# Altium PCB MainBoard.PcbDoc
Units mil, origin at the board's own origin, x right, y up, seen from the top; angles counter-clockwise.
Board outline 1023.62 x 1496.06 mil, 2 copper layers (Top Layer, Bottom Layer), stack 61.855 mil thick; 25 components, 21 nets, 158 pads, 26 vias.
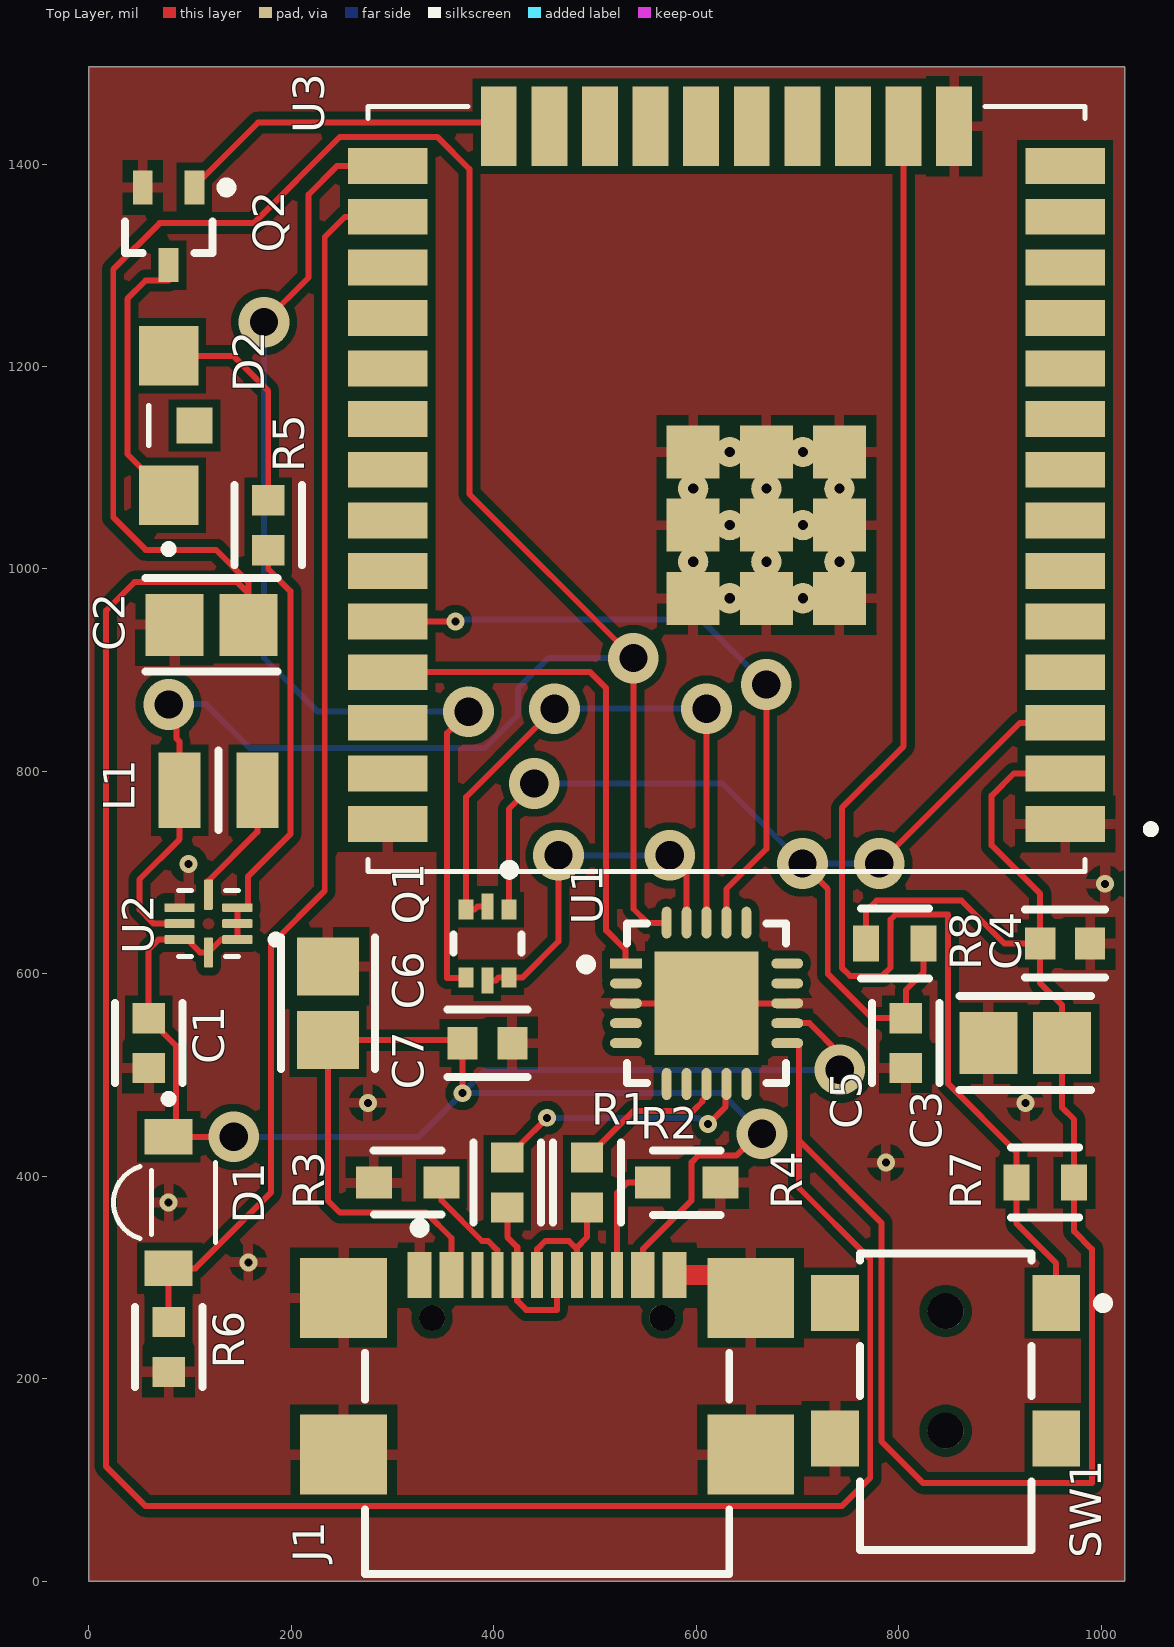
[diagram p0: Top Layer view]
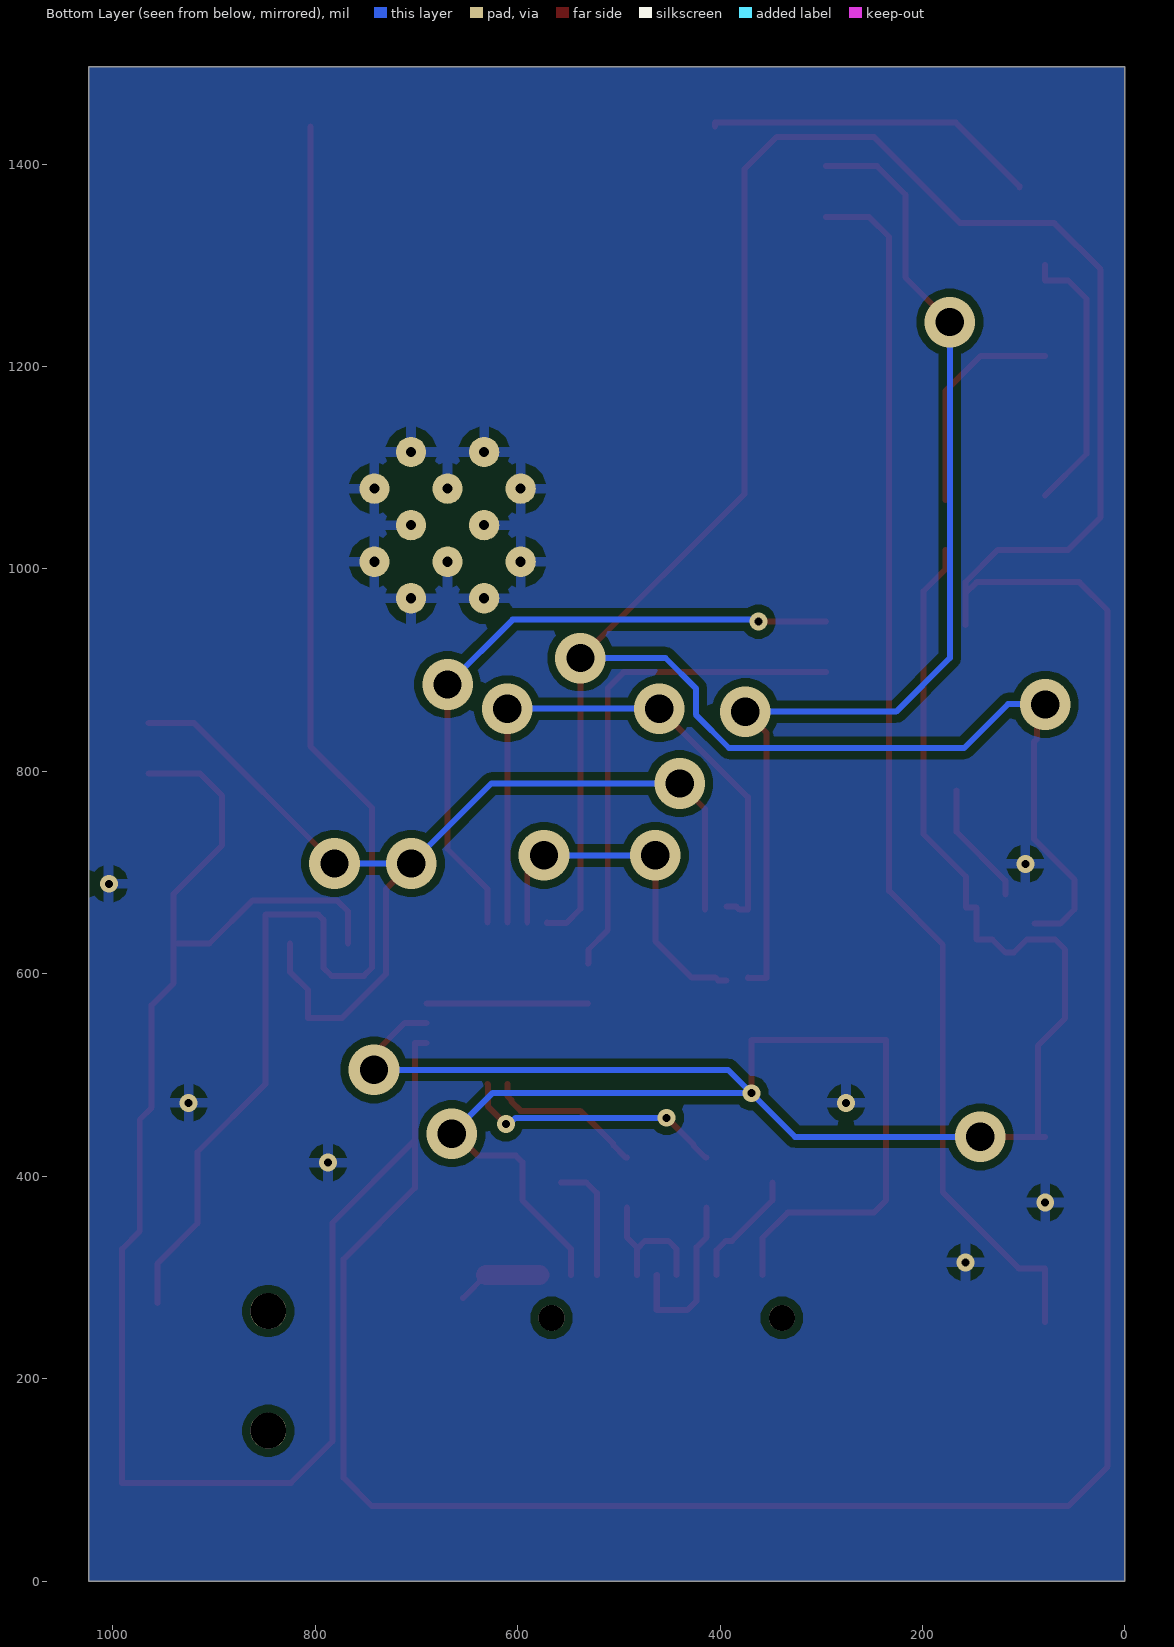
[diagram p1: Bottom Layer view, seen from below]
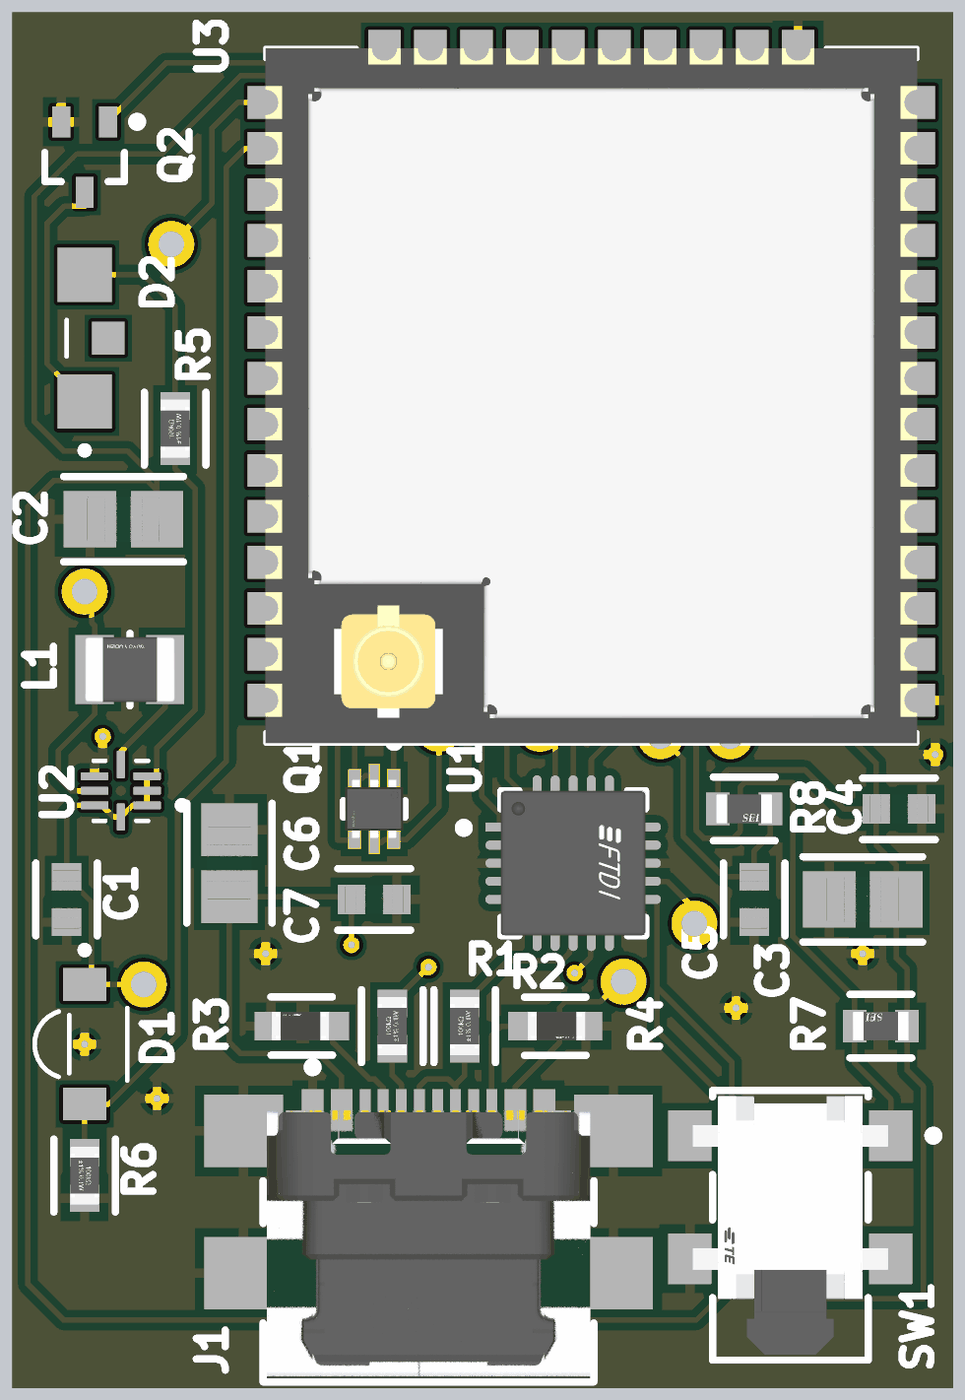
[diagram p2: 3D render of the assembled board from above, using the file's embedded part models]

## Layer stack, top to bottom
Top Solder: solder mask 0.4, Solder Resist, Dk 3.5
Top Layer: signal copper 1.4
Dielectric 1: dielectric 59.0551, FR-4, Dk 4.8
Bottom Layer: signal copper 1.4
Bottom Solder: solder mask 0.4, Solder Resist, Dk 3.5

## Board outline
0,0 1023.62,0 1023.62,1496.06 0,1496.06

## Design rules (kind name [scope] priority, off if disabled: settings)
Clearance [All] p1: gap=7.87 ignorepadtopadclearanceinfootprint=FALSE except(0: Arc-Hole Track-Hole SMDPad-Hole THPad-Hole Via-Hole Fill-Hole Poly-Hole Region-Hole Text-Hole; 5.91: Arc-Arc)
DiffPairsRouting [All] p1: maxlimit=10 minlimit=10 mostfreqgap=10 toplayer_minwidth=5 toplayer_maxwidth=15 toplayer_prefwidth=6 bottomlayer_minwidth=5 bottomlayer_maxwidth=15 bottomlayer_prefwidth=6 maxuncoupledlength=500
PolygonConnect [All] p1: connectstyle=Relief reliefconductorwidth=10 reliefentries=4 polygonreliefangle="90 Angle" airgapwidth=10
RoomDefinition USB [InComponentClass('USB')] p1: confinementstyle=ConfineIn formatcopy=TRUE lockcomponents=FALSE outline -39.37,-39.37 1062.99,-39.37 1062.99,1535.43 -39.37,1535.43
RoomDefinition Microcontroller [InComponentClass('Microcontroller')] p2: confinementstyle=ConfineIn formatcopy=TRUE lockcomponents=FALSE outline -39.37,-39.37 1062.99,-39.37 1062.99,1535.43 -39.37,1535.43
RoomDefinition Power [InComponentClass('Power')] p3: confinementstyle=ConfineIn formatcopy=TRUE lockcomponents=FALSE outline -39.37,-39.37 1062.99,-39.37 1062.99,1535.43 -39.37,1535.43
RoutingVias [All] p1: holewidth=28 width=50 viastyle="Through Hole" minholewidth=28 minwidth=50 maxholewidth=28 maxwidth=50
SolderMaskExpansion [All] p1: expansion=4 istentingtop=FALSE
Width [All] p1: maxlimit=10 minlimit=5.91 preferedwidth=5.91 minimp=50.000000 maximp=50.000000 favimp=50.000000
29 further rules are at their usual default settings.

## Classes and differential pairs
component class USB: C6 C7 J1 Q1 R1 R2 R3 R4 U1
component class Power: C1 C2 L1 U2
component class Microcontroller: C3 C4 C5 D1 D2 Q2 R5 R6 R7 R8 SW1
differential pair D: +D_P -D_N

## Components (designator, comment, footprint, x,y, rotation, side; value= is the part's Value field where it differs from the comment)
C1 "CL10A475KP8NNNC" FP-CL10-IPC_C 59.06,531.5 r270 top
C2 "CL21A106KQFNNNE" FP-CL21-IPC_A 121.03,944.88 r180 top
C3 "CL21A226MQQNNNE" FP-CL21-IPC_A 925.2,531.5 r180 top
C4 "CL10B104MB8NNNC" FP-CL10-IPC_C 964.57,629.92 r0 top
C5 "CL10B104MB8NNNC" FP-CL10-IPC_C 807.09,531.5 r270 top
C6 "CL21A226MQQNNNE" FP-CL21-IPC_A 236.22,570.87 r90 top
C7 "CL10B104MB8NNNC" FP-CL10-IPC_C 393.7,531.5 r0 top
D1 "VEMD2023SLX01" XDCR_VEMD2023SLX01 78.74,374.02 r270 top
D2 "VSMB10940" DIO_VSMB10940 78.74,1141.73 r90 top
J1 "USB4110-GF-A" FP-USB4110-GF-A-MFG 452.76,157.48 r0 top
L1 "CB2518T2R2M" FP-CB2518-IPC_C 128.02,781.37 r180 top
Q1 "PMDT290UCE,115" FP-SOT666-MFG 393.7,629.92 r270 top
Q2 "BSS138PW,115" NXP-SOT323_M 78.74,1338.58 r270 top
R1 "CRGCQ0603F27R" FP-CRGCQ0603-IPC_C 413.39,393.7 r90 top value=27Ω
R2 "CRGCQ0603F27R" FP-CRGCQ0603-IPC_C 492.13,393.7 r90 top value=27Ω
R3 "RT0603FRE075K1L" FP-RT0603-MFG 314.96,393.7 r180 top value=5.1KΩ
R4 "RT0603FRE075K1L" FP-RT0603-MFG 590.55,393.7 r0 top value=5.1KΩ
R5 "CRGCQ0603F56R" FP-CRGCQ0603-IPC_C 177.17,1043.31 r90 top value=56Ω
R6 "CRGCQ0603F330K" FP-CRGCQ0603-IPC_C 78.74,231.22 r270 top value=330KΩ
R7 "RMCF0603FT10K0" FP-RMCF0603-MFG 944.88,393.7 r180 top
R8 "RMCF0603FT10K0" FP-RMCF0603-MFG 796.26,629.92 r0 top
SW1 "1571262-2" FP-1571262-2-MFG 846.46,177.17 r270 top
U1 "FT231XQ-R" FP-QFN-20-MFG 610.24,570.87 r0 top
U2 "SC195ULTRT" QFN40P150X150X60-8N 118.11,649.61 r180 top
U3 "ESP32-WROOM-32U" XCVR_ESP32-WROOM-32U 629.92,1079.13 r180 top

## Footprints (in the part's own frame and the unit in brackets; to place one, negate y for a bottom-side part, rotate by r counter-clockwise, add the part's x,y. Pads: shape width x height; smd on the part's side, far side on the other; paste and mask are expansions set on the pad)
DIO_VSMB10940 [mm]
  rect 0.9x0.9 smd: 1(0,-0.65)
  rect 1.5x1.5 smd: A(1.75,0) C(-1.75,0)
  silkscreen extent -3.2,-0.1 0.5,0.5
FP-1571262-2-MFG [mm]
  rect 1.4x1.2 smd paste+0 mask+0: A(-2.475,2.775) B(0.925,2.775) C(-2.475,-2.775) D(0.925,-2.775)
  round 0.9 hole 0.9 unplated paste-1000 mask+0: ""(-2.275,0) ""(0.725,0)
  silkscreen extent -3.72,-2.15 3.72,4.08, body extent -3.83,-3.47 3.83,3.47, height 0.25
FP-CB2518-IPC_C [mil]
  rect 41.53x75.05 smd paste+0 mask+0: 1(-38.41,0) 2(38.41,0)
  silkscreen extent 0,-39 0,39, body extent -63,-43 63,43, height 10
FP-CL10-IPC_C [mil]
  rect 29.85x31.97 smd paste+0 mask+0: 1(-24.68,0) 2(24.68,0)
  silkscreen extent -40,-33 40,33, body extent -44,-22 44,22, height 10
FP-CL21-IPC_A [mil]
  rect 57.27x61.27 smd paste+0 mask+0: 1(-36.45,0) 2(36.45,0)
  silkscreen extent -65,-46 65,46, body extent -85,-50 85,50, height 10
FP-CRGCQ0603-IPC_C [mil]
  rect 29.85x31.97 smd paste+0 mask+0: 1(-24.68,0) 2(24.69,0)
  silkscreen extent -40,-33 40,33, body extent -44,-22 44,22, height 10
FP-QFN-20-MFG [mm]
  rect 0.8x0.25 smd paste+0 mask+0: 1(-2.025,1)
  rrect100% 0.8x0.25 smd paste+0 mask+0: 2(-2.025,0.5) 3(-2.025,0) 4(-2.025,-0.5) 5(-2.025,-1) 11(2.025,-1) 12(2.025,-0.5) 13(2.025,0) 14(2.025,0.5) 15(2.025,1)
  rrect100% 0.25x0.8 smd paste+0 mask+0: 6(-1,-2.025) 7(-0.5,-2.025) 8(0,-2.025) 9(0.5,-2.025) 10(1,-2.025) 16(1,2.025) 17(0.5,2.025) 18(0,2.025) 19(-0.5,2.025) 20(-1,2.025)
  rect 2.6x2.6 smd paste+0 mask+0: 21(0,0)
  silkscreen extent -3.15,-2 2,2, body extent -2.52,-2.52 2.52,2.52, height 0.25
FP-RMCF0603-MFG [mm]
  rect 0.65x0.9 smd paste+0 mask+0: 1(-0.725,0) 2(0.725,0)
  silkscreen extent -0.85,-0.88 0.85,0.88, body extent -1.15,-0.58 1.15,0.58, height 0.25
FP-RT0603-MFG [mm]
  rect 0.9x0.8 smd paste+0 mask+0: 1(-0.85,0) 2(0.85,0)
  silkscreen extent -0.85,-0.81 0.86,0.8, body extent -1.4,-0.55 1.4,0.55, height 0.25
FP-SOT666-MFG [mm]
  rect 0.5x0.375 smd paste-1000 mask+0: 1(-0.85,0.538) 3(-0.85,-0.538) 4(0.85,-0.538) 6(0.85,0.538)
  rect 0.65x0.3 smd paste-1000 mask+0: 2(-0.925,0) 5(0.925,0)
  silkscreen extent -1.97,-0.85 0.22,0.85, body extent -1.38,-1 1.38,1, height 0.25
FP-USB4110-GF-A-MFG [mm]
  rect 2.18x2 smd paste+0 mask+0: 1(-5.11,3.105) 2(5.11,3.105) 3(-5.11,-0.825) 4(5.11,-0.825)
  rect 0.6x1.15 smd paste+0 mask+0: A1-B12(-3.2,3.68) A4-B9(-2.4,3.68) B1-A12(3.2,3.68) B4-A9(2.4,3.68)
  rect 0.3x1.15 smd paste+0 mask+0: A5(-1.25,3.68) A6(-0.25,3.68) A7(0.25,3.68) A8(1.25,3.68) B5(1.75,3.68) B6(0.75,3.68) B7(-0.75,3.68) B8(-1.75,3.68)
  round 0.65 hole 0.65 unplated paste-1000 mask+0: ""(-2.89,2.605) ""(2.89,2.605)
  silkscreen extent -4.57,-3.82 4.57,4.99, body extent -6.3,-3.92 6.3,4.36, height 0.25
NXP-SOT323_M [mm] "SOT23, 3-Leads, Body 2.2x1.35mm, Pitch 0.65mm, IPC Low Density"
  rect 0.85x0.5 smd: 1(-0.975,0.65) 2(-0.975,-0.65) 3(0.975,0)
  silkscreen extent -1.1,-1.1 0.67,1.58, body extent -0.67,-1.1 0.67,1.1, height 1.1
QFN40P150X150X60-8N [mm]
  rrect25% 0.76x0.22 smd: 1(-0.725,0.4) 2(-0.725,0) 3(-0.725,-0.4) 5(0.725,-0.4) 6(0.725,0) 7(0.725,0.4)
  rrect25% 0.22x0.76 smd: 4(0,-0.725) 8(0,0.725)
  silkscreen extent -1.79,-0.83 0.75,0.83
XCVR_ESP32-WROOM-32U [mm]
  rect 2x0.9 smd: 1(-8.5,8.41) 2(-8.5,7.14) 3(-8.5,5.87) 4(-8.5,4.6) 5(-8.5,3.33) 6(-8.5,2.06) 7(-8.5,0.79) 8(-8.5,-0.48) 9(-8.5,-1.75) 10(-8.5,-3.02) 11(-8.5,-4.29) 12(-8.5,-5.56) 13(-8.5,-6.83) 14(-8.5,-8.1) 25(8.5,-8.1) 26(8.5,-6.83) 27(8.5,-5.56) 28(8.5,-4.29) 29(8.5,-3.02) 30(8.5,-1.75) 31(8.5,-0.48) 32(8.5,0.79) 33(8.5,2.06) 34(8.5,3.33) 35(8.5,4.6) 36(8.5,5.87) 37(8.5,7.14) 38(8.5,8.41)
  rect 0.9x2 smd: 15(-5.715,-9.1) 16(-4.445,-9.1) 17(-3.175,-9.1) 18(-1.905,-9.1) 19(-0.635,-9.1) 20(0.635,-9.1) 21(1.905,-9.1) 22(3.175,-9.1) 23(4.445,-9.1) 24(5.715,-9.1)
  rect 1.33x1.33 smd: G.1(0.835,2.745) G.2(-1,2.745) G.4(-2.835,2.745) G.5(0.835,0.91) G.6(-1,0.91) G.7(-2.835,0.91) G.8(0.835,-0.925) G.9(-1,-0.925) G.10(-2.835,-0.925)
  round 0.762 hole 0.254: G.11(-0.083,2.745) G.12(-1.918,2.745) G.13(0.835,1.827) G.14(-1,1.827) G.15(-2.835,1.827) G.16(-0.083,0.91) G.17(-1.918,0.91) G.18(0.835,-0.008) G.19(-1,-0.008) G.20(-2.835,-0.008) G.21(-0.083,-0.925) G.22(-1.918,-0.925)
  silkscreen extent -10.75,-9.6 9,9.6, body extent -9,-9.6 9,9.6, height 3.3
XDCR_VEMD2023SLX01 [mm]
  rect 0.9x1.2 smd: A(1.65,0) C(-1.65,0)
  silkscreen extent -2.7,-1.38 1,1.17

## Part data
C1: library part CMP-13271-003017-1, "Cap Ceramic 4.7uF 10V X5R ±10% Pad SMD 0603 +85°C T/R", Capacitance=4.7uF, Case Code (Imperial)=0603, Case Code (Metric)=1608, Dielectric=X5R, Max Operating Temperature=85°C, Min Operating Temperature=-55°C, Package Quantity=1, Tolerance=10%, Voltage Rating=10V, Case/Package=0603, Contact Plating=Tin, Depth=0.8mm, Height=0.8mm, Length=1.6mm, Mount="Surface Mount", Packaging="Tape and Reel", Radiation Hardening=No, Thickness=0.035inch, Width=0.031inch
C2: library part CMP-13271-001826-1, "CL21 Series 0805 10uF 6.3V ±10% Tolerance X5R Multilayer Ceramic Chip Capacitor", Capacitance=10uF, Case Code (Imperial)=0805, Case Code (Metric)=2012, Dielectric=X5R, Max Operating Temperature=85°C, Min Operating Temperature=-55°C, Package Quantity=1, Tolerance=10%, Voltage Rating=6.3V, Case/Package=0805, Contact Plating=Tin, Depth=1.25mm, Height=1.25mm, Lead Free="Lead Free", Length=2mm, Mount="Surface Mount", Packaging="Tape and Reel", Radiation Hardening=No, Thickness=0.053inch, Voltage Rating (DC)=6.3V, Width=0.049inch
C3 C6: library part CMP-13271-000185-1, "CL21 Series 0805 22uF 6.3V ±20% Tolerance X5R Multilayer Ceramic Chip Capacitor", Capacitance=22uF, Case Code (Imperial)=0805, Case Code (Metric)=2012, Dielectric=X5R, Max Operating Temperature=85°C, Min Operating Temperature=-55°C, Package Quantity=2000, Tolerance=20%, Voltage Rating=6.3V, Case/Package=0805, Contact Plating=Tin, Depth=1.25mm, Height=1.25mm, Lead Free="Lead Free", Length=2mm, Mount="Surface Mount", Packaging="Tape and Reel", Radiation Hardening=No, Thickness=0.055inch, Voltage Rating (DC)=6.3V, Width=0.049inch
C4 C5 C7: library part CMP-13271-001724-1, "Cap Ceramic 100nF 50V X7R ±20% Pad SMD 0603 +125°C T/R", Capacitance=100nF, Case Code (Imperial)=0603, Case Code (Metric)=1608, Dielectric=X7R, Max Operating Temperature=125°C, Min Operating Temperature=-55°C, Package Quantity=1, Tolerance=20%, Voltage Rating=50V, Case/Package=0603, Depth=0.8mm, Height=0.8mm, Lead Free="Lead Free", Length=1.6mm, Mount="Surface Mount", Packaging="Tape and Reel", Radiation Hardening=No, Thickness=0.035inch, Voltage Rating (DC)=50V, Width=0.031inch
D1: Package=None, Availability=Unavailable, MF="{'manufacturer': u'Vishay Semiconductor'}", MP=VEMD2023SLX01, Price=None
D2: "940 nm 65 mA Â±75Â° Surface Mount High Speed Infrared Emitting Diode", Package=None, Availability=Unavailable, MF="{'manufacturer': u'Vishay Semiconductor'}", MP=VSMB10940, Price=None
J1: library part CMP-245163-000002-1, "CONN USB 2.0 TYPE-C R/A SMT", Current Rating=3/4.25/1.25/0.25A, Manufacturer=GCT, Package=0, Temperature="-40°C to +85°C", Temperature Range High=+85°C, Temperature Range Low=-40°C, Voltage Rating=20V, Automotive=No, Category=Conn, ComponentLink2Description=Datasheet, ComponentLink2URL=https://gct.co/files/drawings/usb4110.pdf, Conn Orientation="Right Angle", Contact Material=Gold,Nickel, Device Class L1=Connectors, Device Class L2="USB Connectors", Device Class L3=unset, Digikey Description="CONN USB 2.0 TYPE-C R/A SMT", Height=3.46mm, Is Female=yes, Lead Free=Yes, Manufacturer Part Number=USB4110-GF-A, Number Of Contacts=16, Octopart=https://octopart.com/usb4110-gf-a-gct-103941985, RoHS=TRUE, Shielding=true, Standoff Height=0.1mm, Usb Standard="USB 2.0"
L1: library part CMP-14484-000089-1, "SMD Inductors 2.2uH ±20% 1.3A 0.117Ω 1007", Case Code (Imperial)=1007, Case Code (Metric)=2518, Current Rating=1.3A, DC Resistance (DCR)=117mR, Inductance=2.2uH, Max DC Current=510mA, Max Operating Temperature=105°C, Min Operating Temperature=-40°C, Package Quantity=2000, Resistor Type=Wirewound, Self Resonant Frequency=68MHz, Test Frequency=7.96MHz, Tolerance=20%, Case/Package=1007, Core Material=Ferrite, Depth=2mm, Halogen Free="Halogen Free", Height=1.8mm, Height - Seated (Max)=0.079inch, Lead Free="Lead Free", Length=0.098inch, Mount="Surface Mount", Number of Pins=2, Packaging="Tape and Reel", Radiation Hardening=No, Saturation Current=510mA, Series=CB, Shielding=Unshielded, Termination=SMD/SMT, Width=0.071inch
Q1: library part CMP-14409-000021-1, "MOSFET N/P-CH 20V SOT666"
Q2: library part CMP-1259-00109-1, "N-Channel Trench MOSFET, 60 V, 0.32 A, -55 to 150 degC, 3-Pin SOT323, Tape and Reel", Manufacturer="NXP Semiconductors", Automotive Qualified=Y, Channel Type=N, Code_JEITA=SC-70, ComponentLink1Description="Manufacturer URL", ComponentLink1URL=http://www.nxp.com/, ComponentLink2Description=Datasheet, ComponentLink2URL=http://www.nxp.com/documents/data_sheet/BSS138PW.pdf, ComponentLink3Description="Package Specification", ComponentLink3URL=http://www.nxp.com/documents/outline_drawing/sot323_po.pdf, DatasheetVersion="Rev. 1", ID [max] (A)=0.32, IDM [max] (A)=1.2, Mounting Technology="Surface Mount", PackageDescription="3-Pin Small Outline Transistor Package, Body 2 x 1.25 mm, Pitch 0.65 mm", PackageReference=SOT323, PackageVersion="06-03-16, 03/2006", Packing="Tape & Reel", PartNumber=BSS138PW,115, VDS [max] (V)=60, VGSth [typ] (V)=1.2
R1 R2: library part CMP-03211-005286-1, "CRGCQ 0603 27R 1%", Ambient Temperature Range High=+70°C, Manufacturer="TE Connectivity", Package=CRGCQ0603, Power Rating=0.1W, Resistance=27Ω, Temperature="-55°C to +155°C", Temperature Coefficient=±200ppm/°C, Temperature Range High=+155°C, Temperature Range Low=-55°C, Tolerance=0.01, Voltage Rating=75V, Category=Res, ComponentLink2Description=Datasheet, ComponentLink2URL=https://www.te.com/commerce/DocumentDelivery/DDEController?Action=showdoc&DocId=Data+Sheet%7F1773204-3%7F1%7Fpdf%7FEnglish%7FENG_DS_1773204-3_1.pdf%7F4-2176339-332, Composition="Thick Film", Device Class L1="Passive Components", Device Class L2=Resistors, Device Class L3="Chip SMD Resistors", Digikey Description="CRGCQ 0603 27R 1%", Height=0.55mm, Ipc Land Pattern Name=RESC16080X45, Lead Free=Yes, Manufacturer Part Number=CRGCQ0603F27R, Octopart=https://octopart.com/crgcq0603f27r-te+connectivity-91018062, RoHS=TRUE, Series=CRGCQ
R3 R4: library part CMP-2000-04778-2, "RES SMD 5.1K OHM 1% 1/10W 0603", Manufacturer=Yageo, Package=RT0603, Power Rating=0.1W, Resistance=5.1KΩ, Temperature="-55°C to +155°C", Temperature Coefficient="50 ppm/°C", Temperature Range High=+155°C, Temperature Range Low=-55°C, Tolerance=0.01, Voltage Rating=75V, Automotive=No, Category=Res, ComponentLink2Description=Datasheet, ComponentLink2URL=http://www.yageo.com/documents/recent/PYu-RT_1-to-0.01_RoHS_L_9.pdf, Composition="Thin Film", Device Class L1="Passive Components", Device Class L2=Resistors, Device Class L3="Chip SMD Resistors", Digikey Description="RES SMD 5.1K OHM 1% 1/10W 0603", Footprint Url=http://www.yageo.com/exep/pages/download/literatures/PYu-R_Mount_10.pdf, Height=0.55mm, Ipc Land Pattern Name=RESC16080X45, Lead Free=Yes, Manufacturer Part Number=RT0603FRE075K1L, Mouser Description="Res Thin Film 0603 5.1K Ohm 1% 0.1W(1/10W) ±50ppm/C Epoxy Pad SMD T/R", Octopart=https://octopart.com/rt0603fre075k1l-yageo-1421390, RoHS=TRUE, Series=RT
R5: library part CMP-03211-009681-1, "CRGCQ0603 56Ω 1% ±200ppm/°C 75V", Ambient Temperature Range High=+70°C, Manufacturer="TE Connectivity", Package=CRGCQ0603, Power Rating=0.1W, Resistance=56Ω, Temperature="-55°C to +155°C", Temperature Coefficient=±200ppm/°C, Temperature Range High=+155°C, Temperature Range Low=-55°C, Tolerance=0.01, Voltage Rating=75V, Category=Res, ComponentLink2Description=Datasheet, ComponentLink2URL=https://www.te.com/commerce/DocumentDelivery/DDEController?Action=showdoc&DocId=Data+Sheet%7F1773204-3%7F1%7Fpdf%7FEnglish%7FENG_DS_1773204-3_1.pdf%7F4-2176339-408, Composition="Thick Film", Device Class L1="Passive Components", Device Class L2=Resistors, Device Class L3="Chip SMD Resistors", Height=0.55mm, Ipc Land Pattern Name=RESC16080X45, Lead Free=Yes, Manufacturer Part Number=CRGCQ0603F56R, Octopart=https://octopart.com/crgcq0603f56r-te+connectivity-91018083, RoHS=TRUE, Series=CRGCQ
R6: library part CMP-03211-011074-1, "Res Thick Film 0603 330K Ohm 1% 0.1W(1/10W) ±100ppm/C Pad SMD Automotive T/R", Ambient Temperature Range High=+70°C, Manufacturer="TE Connectivity", Package=CRGCQ0603, Power Rating=0.1W, Resistance=330KΩ, Temperature="-55°C to +155°C", Temperature Coefficient=±100ppm/°C, Temperature Range High=+155°C, Temperature Range Low=-55°C, Tolerance=0.01, Voltage Rating=75V, Category=Res, ComponentLink2Description=Datasheet, ComponentLink2URL=https://www.te.com/commerce/DocumentDelivery/DDEController?Action=showdoc&DocId=Data+Sheet%7F1773204-3%7F1%7Fpdf%7FEnglish%7FENG_DS_1773204-3_1.pdf%7F4-2176339-1264, Composition="Thick Film", Device Class L1="Passive Components", Device Class L2=Resistors, Device Class L3="Chip SMD Resistors", Digikey Description="Res Thick Film 0603 330K Ohm 1% 0.1W(1/10W) ±100ppm/C Pad SMD Automotive T/R", Height=0.55mm, Ipc Land Pattern Name=RESC16080X45, Lead Free=Yes, Manufacturer Part Number=CRGCQ0603F330K, Octopart=https://octopart.com/crgcq0603f330k-te+connectivity-91018065, RoHS=TRUE, Series=CRGCQ
R7 R8: library part CMP-2000-06990-2, "10kΩ ±1% 0.1W 0603 Thick Film Chip Resistor AEC-Q200 compliant", Case Code (Imperial)=0603, Case Code (Metric)=1608, Max Operating Temperature=155°C, Max Power Dissipation=100mW, Min Operating Temperature=-55°C, Resistance=10kR, Resistor Type="Thick Film", Temperature Coefficient=100ppm/°C, Tolerance=1%, Case/Package=0603, Construction=Rectangular, Contact Plating=Tin, Depth=0.8mm, Features="Automotive AEC-Q200", Height=0.022inch, Lead Free="Lead Free", Length=1.55mm, Military Standard=Not, Mount="Surface Mount", Number of Terminations=2, Packaging="Tape and Reel", Power Rating=100mW, Radiation Hardening=No, RoHS Compliant=Yes, Series=RMCF, Size Code=0603, Width=0.031inch
SW1: library part CMP-03402-000034-1, "SWITCH TACTILE SPST-NO 0.05A 12V", Actuator Color=Black, Case/Package=SMD/SMT, Contact Current Rating=50mA, Max Operating Temperature=85°C, Max Voltage Rating (DC)=12V, Min Operating Temperature=-20°C, Operating Force=1.6N, Package Quantity=1, Actuator Length=0.055inch, Actuator Material="Liquid Crystal Polymer", Contact Material="Stainless Steel", Contact Plating=Silver, Current Rating=50mA, Depth=7.15mm, ELV=Compliant, Housing Material=Nylon, Illumination Type=Non-Illuminated, Length=5.4mm, Material=Nylon, Max Current Rating=50mA, Mechanical Life=50000Cycles, Mount="Surface Mount", Orientation="Right Angle", Packaging="Tape and Reel", Radiation Hardening=No, RoHS Compliant=Yes, Series=Alcoswitch, Switch Function=Off-Mom, Termination="Gull Wing", Throw Configuration=SPST, Type=Switch, Voltage Rating (DC)=12V
U1: library part CMP-0248-00001-3, "IC USB SERIAL FULL UART 20QFN", Case/Package=QFN, Max Operating Temperature=85°C, Max Supply Voltage=5.5V, Min Operating Temperature=-40°C, Min Supply Voltage=2.97V, Operating Supply Current=8mA, Package Quantity=5000, Data Rate=12Mbps, Interface=UART, Lead Free="Lead Free", Mount="Surface Mount", Number of Channels=1, Number of Pins=20, Packaging="Tape and Reel", Weight=0.004339oz
U2: "Buck Switching Regulator IC Positive Programmable 0.8V 1 Output 500mA 8-UFQFN", Package=None, Availability=Unavailable, MF="{'manufacturer': u'Semtech Corporation'}", MP=SC195ULTRT, Price=None
U3: "Wi-Fi/BT BLE Module ESP32-D0WD SPI Flash UART U.FL Conn.", Package=None, Availability=Unavailable, MF="{'manufacturer': u'Espressif Systems'}", MP=ESP32-WROOM-32U, Price=None

## Via types
v1: diameter 50, hole 28, Top Layer to Bottom Layer, 15 vias
v2: diameter 17.72, hole 7.87, Top Layer to Bottom Layer, 11 vias

## Nets (pads, with @x,y where several pads share a name; then routed paths per layer and width w, separated by ;. In a path a pad name is that pad's centre, name@x,y a point inside that pad or via, vN(x,y) a via of type N, cw(c..) or ccw(c..) an arc to the next point about the centre after c; other vN are vias at no path point)
3V3: C2.1 C3.1 C4.1 L1.2 R7.1 R8.1 U1.11 U1.20 U2.6 U3.2 | length 6341.6
  Top Layer w5.91: v1(78.74,866.14) 86.66,858.22 86.66,832.28 89.61,829.33 L1.2 89.61,733 50,693.39 50,663.61 64,649.61 U2.6 ; C2.1 157.48,976 ; U1.20 570.87,650 552,650 538,664 v1(538,912) 376,1074 376,1395 344,1427 248,1427 162.78,1341.78 69.78,1341.78 24,1296 24,1051 56,1019 125.48,1019 157.48,987 157.48,976 ; U1.11 701.58,531.5 701.58,435.42 ; R8.1 767.72,661.83 778.14,672.25 862.21,672.25 904.53,629.92 C4.1 ; U3.2 914.03,798.03 892,776 892,727 939.88,679.12 C4.1 ; 157.48,976 146.48,987 45,987 17,959 17,113 56,74 744,74 772,102 772,318 701.58,388.42 701.58,435.42 ; 701.58,435.42 783,354 783,138 824,97 991,97 991,328 973.43,345.57 R7.1 973.43,456 961.65,467.78 C3.1 961.65,569 939.88,590.76 C4.1
  Bottom Layer w5.91: v1(78.74,866.14) 79.05,866.45 115.55,866.45 158.83,823.17 391.17,823.17 424,856 424,882 454,912 v1(538,912)
5V: C1.1 C6.1 C7.1 D1.C J1.A4-B9 J1.B4-A9 R5.1 U1.12 U2.1 U2.2 U2.3 U2.7 U2.8 | length 2534.2
  Top Layer w5.91: D1.C D1.C@86,438.98 ; v1(143,438.98) D1.C@86,438.98 ; R5.1 177.17,1000 199,978.17 199,738 157,696 157,665.35 U2.3 U2.2 U2.1 130.9,633.86 U2.8 109.79,621.06 97,633.86 U2.7 68.91,633.86 59.06,624 C1.1 59.06,556 86,529.06 D1.C@86,438.98 ; J1.A4-B9 358.27,339 333.27,364 248,364 236.22,375.78 C6.1 369.02,534.42 C7.1 v2(369.02,482.02) ; J1.B4-A9 547.24,328 595.47,376.23 595.47,413.93 601.81,420.27 639.52,420.27 661.24,442 v1(665,442) ; U1.12 712,551.18 742,521.18 v1(742,505.18)
  Bottom Layer w5.91: v1(143,438.98) 325.98,438.98 v2(369.02,482.02) ; v1(665,442) 625,482 v2(369.02,482.02) ; v1(742,505.18) 392.18,505.18 v2(369.02,482.02)
CC1: J1.A5 R3.1 | length 117.8
  Top Layer w5.91: R3.1 348.43,376 388.43,336 394.54,336 403.54,327 J1.A5
CC2: J1.B5 R4.1 | length 120.7
  Top Layer w5.91: J1.B5 521.65,383.35 532,393.7 R4.1
D_N: J1.A7 J1.B7 R1.1 | length 173.7
  Top Layer w6: R1.1 413.39,339.84 423.23,330 J1.B7 423.23,276.77 432,268 462.6,268 J1.A7
D_P: J1.A6 J1.B6 R2.1 | length 142.4
  Top Layer w6: J1.A6 442.91,328 450.91,336 474.28,336 482.28,328 ; J1.B6 482.28,328 ; R2.1 492.13,339.84 482.28,330 482.28,328
DTR: Q1.2 Q1.3 U1.18 | length 618.9
  Top Layer w5.91: Q1.2 383.95,666.34 381,663.39 Q1.3 372.52,774.52 v1(460,862) ; U1.18 v1(610.24,862)
  Bottom Layer w5.91: v1(460,862) v1(610.24,862)
EN: C5.1 Q1.1 R8.2 U3.3 | length 1045.6
  Top Layer w5.91: Q1.1 414.88,762.88 v1(440,788) ; v1(705,709) 730,684 730,600 773.82,556.18 C5.1 807.09,584 824.8,601.72 R8.2 ; v1(780.97,709) 920,848.03 U3.3
  Bottom Layer w5.91: v1(440,788) 626,788 v1(705,709) v1(780.97,709)
ESP->FT: U1.1 U3.35 | length 502.7
  Top Layer w5.91: U3.35 495.22,898.03 511,882.25 511,643 530,624 530,610.24 U1.1
FT->ESP: U1.17 U3.34 | length 653
  Top Layer w5.91: U3.34 v2(362,948.03) ; U1.17 629.92,684 669.29,723.37 v1(669.29,885.83)
  Bottom Layer w5.91: v2(362,948.03) 363.97,950 605,950 669.17,885.83 v1(669.29,885.83)
GND: C1.2 C2.2 C3.2 C4.2 C5.2 C6.2 C7.2 J1.1 J1.2 J1.3 J1.4 J1.A1-B12 J1.B1-A12 Q2.2 R3.2 R4.2 R6.2 SW1.D U1.3 U1.13 U1.21 U2.5 U3.1 U3.15 U3.38 U3.G.1 U3.G.2 U3.G.4 U3.G.5 U3.G.6 U3.G.7 U3.G.8 U3.G.9 U3.G.10 U3.G.11 U3.G.12 U3.G.13 U3.G.14 U3.G.15 U3.G.16 U3.G.17 U3.G.18 U3.G.19 U3.G.20 U3.G.21 U3.G.22 | length 244
  Top Layer w5.91: U1.3 U1.21 U1.13 ; J1.2@631.3,302.36 J1.2
  Top Layer w20: J1.B1-A12 J1.2@631.3,302.36
  other v2: 157.48,314.96 78.74,374.02 787.4,413.39 275.59,472.44 925.2,472.44 1003.94,688.98 98.43,708.66
IO0: Q1.4 U3.25 | length 1080.8
  Top Layer w5.91: v1(173,1244) 217,1288 217,1370.03 245,1398.03 U3.25 ; Q1.4 372.52,596 354,596 354,838 v1(375,859)
  Bottom Layer w5.91: v1(173,1244) 173,912 226,859 v1(375,859)
LED_RX: D1.A R6.1 U3.26 | length 1222
  Top Layer w5.91: R6.1 D1.A 105.06,309.06 180,384 180,629 233,682 233,1328.03 253,1348.03 U3.26
LED_TX: Q2.1 U3.24 | length 331.5
  Top Layer w5.91: Q2.1 104.33,1378.33 167,1441 404.92,1441 U3.24
NetD2_A: D2.A R5.2 | length 220.8
  Top Layer w5.91: D2.A 142.54,1210.63 177.17,1176 R5.2
NetD2_C: D2.C Q2.3 | length 274.4
  Top Layer w5.91: D2.C 38,1113.57 38,1267 56,1285 78.74,1285 Q2.3
NetL1_1: L1.1 U2.4 | length 123.2
  Top Layer w5.91: U2.4 118.11,692 166.44,740.33 L1.1
NetR1_2: R1.2 U1.9 | length 265.2
  Top Layer w5.91: R1.2 414.45,418.39 426.42,430.36 426.42,431.42 v2(452.76,457.76) ; v2(611.75,451.4) 629.17,468.82 629.17,490.39 U1.9
  Bottom Layer w5.91: v2(452.76,457.76) 602.19,457.76 608.55,451.4 v2(611.75,451.4)
NetR2_2: R2.2 U1.8 | length 156.7
  Top Layer w5.91: R2.2 493.19,418.39 505.16,430.36 505.16,431.42 538.31,464.57 564.34,464.57 577.39,464.57 584.03,464.57 597.08,464.57 606.3,473.79 606.3,475.31 610.24,479.25 U1.8
RESET: R7.2 SW1.A U3.16 | length 1445.9
  Top Layer w5.91: U3.16 804.92,824.92 744,764 744,606 752,598 784,598 792,606 792,653.47 797,658.47 849,658.47 849,491.34 916.34,424 R7.2 916.34,353.37 955.71,314 SW1.A
RTS: Q1.5 Q1.6 U1.19 | length 356.6
  Top Layer w5.91: Q1.5 402,593.5 404.95,596.46 Q1.6 428.46,596.46 464,632 v1(464,717) ; v1(574,717) 577.55,717 590.55,704 U1.19
  Bottom Layer w5.91: v1(464,717) v1(574,717)
pads on no net: D2.1 J1. J1.A8 J1.B8 SW1. SW1.B SW1.C U1.2 U1.4 U1.5 U1.6 U1.7 U1.10 U1.14 U1.15 U1.16 U3.4 U3.5 U3.6 U3.7 U3.8 U3.9 U3.10 U3.11 U3.12 U3.13 U3.14 U3.17 U3.18 U3.19 U3.20 U3.21 U3.22 U3.23 U3.27 U3.28 U3.29 U3.30 U3.31 U3.32 U3.33 U3.36 U3.37

## Polygon pours and split planes (outlines as drawn)
GND on Top Layer "GND_L01_P000" (solid, pour order 0): 0,1496.06 1023.62,1496.06 1023.62,0 0,0
GND on Bottom Layer "GND_L02_P001" (solid, pour order 1): 0,1496.06 1023.62,1496.06 1023.62,0 0,0

## Silkscreen, mask and mechanical layers (free items; w line width, h text height)
Mechanical 1:
  the board outline again, w0.39